# EAGLE board M_3x4._v8 (EAGLE 9.6.2), part 1 of 2
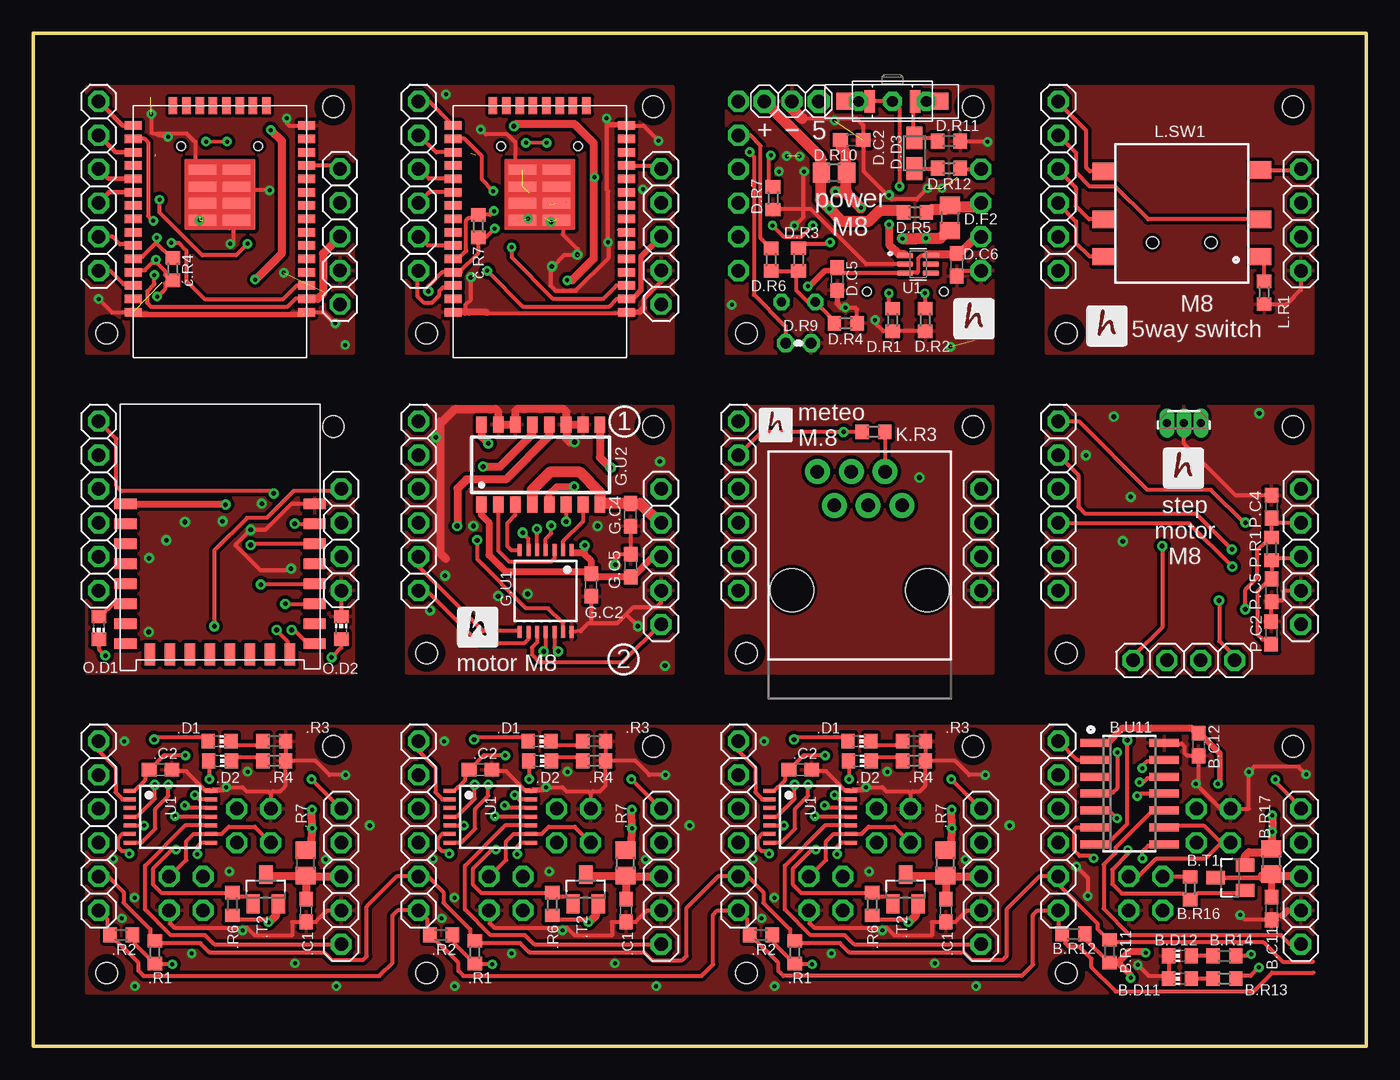
[diagram p0: board, top side]
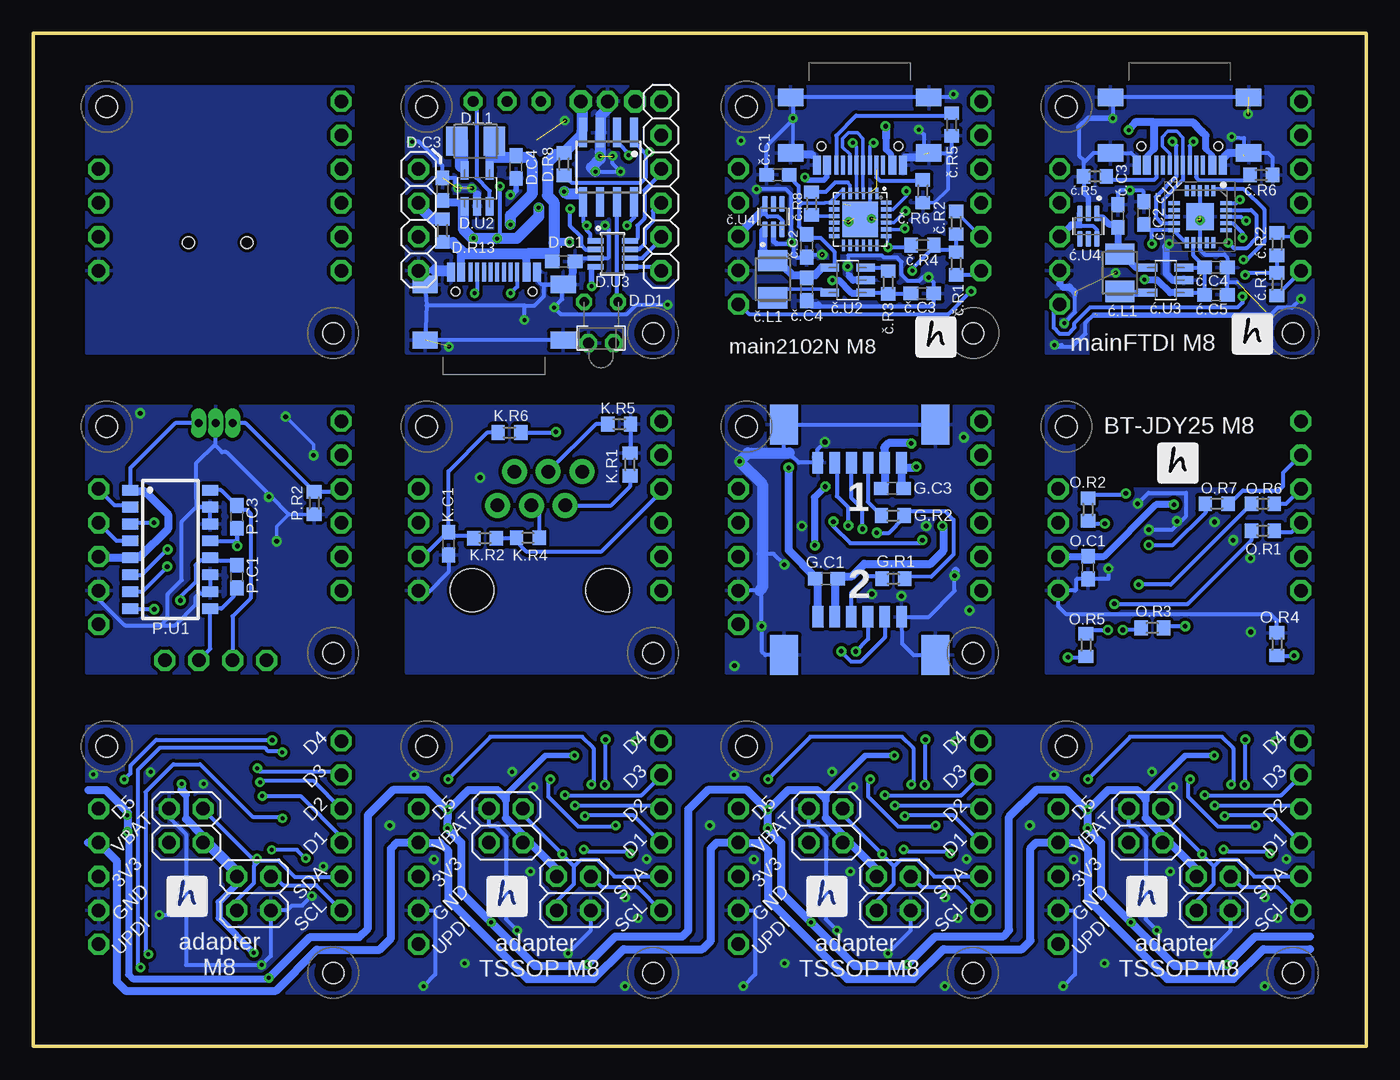
[diagram p1: board, bottom side, seen from below]

Size 100 x 76 mm. Coordinates in mm from the lower left corner, seen from the top.
Outline: 0,0 100,0 100,76 0,76 0,0
Copper layers (1*16): Top 0.035mm / dielectric 1.5mm / Bottom 0.035mm
Design rules "default *": minimum track width 10mil, minimum drill 0.3mm, track to track 6mil, track to pad 6mil, pad to pad 6mil, via to via 6mil, smd to smd 6mil, copper to edge 0mil, drill to drill 15mil, minimum pad ring 10mil, minimum via ring 8mil, stop-mask expansion 4mil, vias tented up to drill 14mil, thermal gap 10mil
Holes 1.6 mm at 53.5,53.5 70.5,70.5 77.5,53.5 94.5,70.5 70.5,46.5 53.5,29.5 77.5,29.5 94.5,46.5 22.5,46.5 77.5,5.5 94.5,22.5 29.5,29.5 46.5,46.5 5.5,5.5 22.5,22.5 29.5,5.5 46.5,22.5 53.5,5.5 70.5,22.5 29.5,53.5 46.5,70.5 5.5,53.5 22.5,70.5
tRestrict: area 69.5,69.5 to 71.5,71.5; area 52.5,52.5 to 54.5,54.5; area 93.5,69.5 to 95.5,71.5; area 76.5,52.5 to 78.5,54.5; area 69.5,45.5 to 71.5,47.5; area 52.5,28.5 to 54.5,30.5; area 93.5,45.5 to 95.5,47.5; area 76.5,28.5 to 78.5,30.5; area 21.5,45.5 to 23.5,47.5; area 93.5,21.5 to 95.5,23.5; area 76.5,4.5 to 78.5,6.5; area 45.5,45.5 to 47.5,47.5; 11 more areas
bRestrict: area 52.5,52.5 to 54.5,54.5; area 69.5,69.5 to 71.5,71.5; area 76.5,52.5 to 78.5,54.5; area 93.5,69.5 to 95.5,71.5; area 52.5,28.5 to 54.5,30.5; area 69.5,45.5 to 71.5,47.5; area 76.5,28.5 to 78.5,30.5; area 93.5,45.5 to 95.5,47.5; area 21.5,45.5 to 23.5,47.5; area 93.5,21.5 to 95.5,23.5; area 76.5,4.5 to 78.5,6.5; area 28.5,28.5 to 30.5,30.5; 11 more areas

## Footprints (pad centres in the part's own frame; a part is rotated, then mirrored left to right if it is on the bottom)
C0603 = smd 1.1 x 1: 1 -0.85,0; 2 0.85,0
CHIP-LED0603 = smd 1.1 x 1: A1 0,-0.85; C1 0,0.85
1X05 = drill 1.016 pad 1.575 octagon: 1 -5.08,0; 2 -2.54,0; 3 0,0; 4 2.54,0; 5 5.08,0
1X06 = drill 1.016 pad 1.575 octagon: 1 -6.35,0; 2 -3.81,0; 3 -1.27,0; 4 1.27,0; 5 3.81,0; 6 6.35,0
2X02 = drill 1.016 pad 1.575 octagon: 1 -1.27,-1.27; 2 -1.27,1.27; 3 1.27,-1.27; 4 1.27,1.27
R0603 = smd 1 x 1.1: 1 -0.85,0; 2 0.85,0
FUSE = smd 1.3 x 1.5: 1 -0.95,0; 2 0.95,0
SO23 = smd 1 x 1.4: D 0,1.1; G -0.95,-1.1; S 0.95,-1.1
SO14 = smd 0.6 x 2.2: 1 -3.81,-2.6; 2 -2.54,-2.6; 3 -1.27,-2.6; 4 0,-2.6; 5 1.27,-2.6; 6 2.54,-2.6; 7 3.81,-2.6; 8 3.81,2.6; 9 2.54,2.6; 10 1.27,2.6; 11 0,2.6; 12 -1.27,2.6; 13 -2.54,2.6; 14 -3.81,2.6
LED_1.8 = drill 0.7 octagon: 1 -1.27,-0.4; 2 1.27,-0.4
SHOTKY_2.8 = smd 1.7 x 1.2: A -1.15,0; K 1.15,0
R0805 = smd 1.3 x 1.5: 1 -0.95,0; 2 0.95,0
1X04 = drill 1.016 pad 1.575 octagon: 1 -3.81,0; 2 -1.27,0; 3 1.27,0; 4 3.81,0
L3230M = smd 1.6 x 2.2: 1 -1.4,0; 2 1.4,0
1X-03-2 = drill 1.016 pad 1.676 octagon: 1 -2.016,0; 3 2.048,0 | drill 1.016 pad 1.575 octagon: 2 -0.016,0
SWITCH = drill 0.8 pad 1.422 octagon: P$1 2.54,0; P$2 0,0; P$3 -2.54,0 | smd 0.8 x 1.7: P$4 -1.7,0; P$5 1.7,0 | smd 1.27 x 1.27: P$6 -3.556,0; P$7 3.556,0
THERM = drill 0.813 octagon: 1 -0.953,0; 2 0.953,0
SOP8 = smd 0.6 x 2.2: 1 -1.905,-2.6; 2 -0.635,-2.6; 3 0.635,-2.6; 4 1.905,-2.6; 5 1.905,2.6; 6 0.635,2.6; 7 -0.635,2.6; 8 -1.905,2.6
SOT32-5 = smd 0.6 x 1.4: BP 0.95,1.35; GND 0,-1.35; SHDN 0.95,-1.35; VIN -0.95,-1.35; VOUT -0.95,1.35
SOT23-8 = smd 0.4 x 1.2: 1 -0.975,-1.3; 2 -0.325,-1.3; 3 0.325,-1.3; 4 0.975,-1.3; 5 0.975,1.3; 6 0.325,1.3; 7 -0.325,1.3; 8 -0.975,1.3
A1250WR-6 = smd 0.8 x 1.6: 1 -3.128,2.54; 2 -1.878,2.54; 3 -0.628,2.54; 4 0.622,2.54; 5 1.872,2.54; 6 3.142,2.54 | smd 2.1 x 3: $1 -5.678,-0.34; $2 5.682,-0.34
TSSOP14 = smd 0.3 x 0.9: 1 -1.95,-3.06; 2 -1.3,-3.06; 3 -0.65,-3.06; 4 0,-3.06; 5 0.65,-3.06; 6 1.3,-3.06; 7 1.95,-3.06; 8 1.95,3.06; 9 1.3,3.06; 10 0.65,3.06; 11 0,3.06; 12 -0.65,3.06; 13 -1.3,3.06; 14 -1.95,3.06
SOP16 = smd 0.8 x 1.2: 1 -4.445,-3; 2 -3.175,-3; 3 -1.905,-3; 4 -0.635,-3; 5 0.635,-3; 6 1.905,-3; 7 3.175,-3; 8 4.445,-3; 9 4.445,3; 10 3.175,3; 11 1.905,3; 12 0.635,3; 13 -0.635,3; 14 -1.905,3; 15 -3.175,3; 16 -4.445,3
RJ11-6 = drill 1.016 pad 1.88: 1 -3.175,8.89; 2 -1.905,6.35; 3 -0.635,8.89; 4 0.635,6.35; 5 1.905,8.89; 6 3.175,6.35 | hole 3.251: -5.08,0; 5.08,0
5_WAY_SWITCH = smd 1.6 x 1.3: 1 -6,3; 2 -6,0.2; 3 -6,-3.5; 4 5.8,3; 5 5.8,0.2; 6 5.8,-3.4 | hole 0.9: 2.1,1.95; -2.3,1.95
SIP3-UA = drill 0.6 pad 0.889 long: 1 -1.27,0; 2 0,0; 3 1.27,0
SOT65P210X110-6N = smd 1.19 x 0.4: 1 -0.96,0.65; 2 -0.96,0; 3 -0.96,-0.65; 4 0.96,-0.65; 5 0.96,0; 6 0.96,0.65
USB-C = smd 0.6 x 1.45: A1B12 -3.235,3.825; A4B9 -2.46,3.825; B1A12 3.215,3.825; B4A9 2.44,3.825 | smd 0.3 x 1.45: A5 -1.26,3.825; A6 -0.26,3.825; A7 0.24,3.825; A8 1.24,3.825; B5 1.74,3.825; B6 0.74,3.825; B7 -0.76,3.825; B8 -1.76,3.825 | smd 1.9 x 1.3: SH1 -5.18,2.91; SH2 -5.18,-1.27; SH3 5.18,-1.27; SH4 5.18,2.91 | hole 0.65: 2.88,2.38; -2.9,2.38
JDY-25 = smd 1.676 x 0.813: ALED 14.6,2; GND 14.6,12.5; INPUT1 0.4,2; INPUT3 0.4,3.5; INPUT5 0.4,6.5; NC1 0.4,11; NC2 0.4,9.5; NC3 0.4,8; OUT3 14.6,3.5; OUT4 14.6,8; PWRC 14.6,9.5; RST 14.6,11; RXD 14.6,6.5; STAT 0.4,5; TXD 14.6,5; VCC 0.4,12.5 | smd 0.813 x 1.676: INPUT2 3.75,1.2; INPUT4 6.75,1.2; NC4 2.25,1.2; NC5 9.75,1.2; NC6 11.25,1.2; OUT1 12.75,1.2; OUT2 5.25,1.2; OUT5 8.25,1.2
TTGO-MICRO-32 = smd 1.27 x 0.635: 3V3 -6.5,5; EN -6.5,4; GND1 -6.5,6; GND2 -6.5,-8; GND3 6.5,6; IO0 6.5,-7; IO2 6.5,-8; IO4 6.5,-6; IO5 6.5,-3; IO12 -6.5,-7; IO14 -6.5,-6; IO16 6.5,-5; IO17 6.5,-4; IO18 6.5,-2; IO19 6.5,-1; IO21 6.5,1; IO22 6.5,4; IO23 6.5,5; IO25 -6.5,-3; IO26 -6.5,-4; IO27 -6.5,-5; IO32 -6.5,-1; IO33 -6.5,-2; IO34 -6.5,1; IO35 -6.5,0; NC 6.5,0; RXD0 6.5,2; TXD0 6.5,3; VN -6.5,2; VP -6.5,3 | smd 0.635 x 1.27: CLK 0.5,-9.5; CMD -0.5,-9.5; IO13 -3.5,-9.5; IO15 3.5,-9.5; SD0 1.5,-9.5; SD1 2.5,-9.5; SD2 -2.5,-9.5; SD3 -1.5,-9.5 | smd 2.032 x 0.762: GND4 -1.27,-0.889; GND5 1.27,-0.889; GND6 -1.27,-2.159; GND7 1.27,-2.159; GND8 -1.27,-3.429; GND9 -1.27,-4.699; GND10 1.27,-3.429; GND11 1.27,-4.699
QFN50P400X400X80-21N = smd 0.85 x 0.3: 1 -1.95,1; 2 -1.95,0.5; 3 -1.95,0; 4 -1.95,-0.5; 5 -1.95,-1; 11 1.95,-1; 12 1.95,-0.5; 13 1.95,0; 14 1.95,0.5; 15 1.95,1 | smd 0.3 x 0.85: 6 -1,-1.95; 7 -0.5,-1.95; 8 0,-1.95; 9 0.5,-1.95; 10 1,-1.95; 16 1,1.95; 17 0.5,1.95; 18 0,1.95; 19 -0.5,1.95; 20 -1,1.95 | smd 2.05 x 2.05: 21 0,0
QFN50P400X400X80-25N = smd 0.81 x 0.26: 1 -1.955,1.25; 2 -1.955,0.75; 3 -1.955,0.25; 4 -1.955,-0.25; 5 -1.955,-0.75; 6 -1.955,-1.25; 13 1.955,-1.25; 14 1.955,-0.75; 15 1.955,-0.25; 16 1.955,0.25; 17 1.955,0.75; 18 1.955,1.25 | smd 0.26 x 0.81: 7 -1.25,-1.955; 8 -0.75,-1.955; 9 -0.25,-1.955; 10 0.25,-1.955; 11 0.75,-1.955; 12 1.25,-1.955; 19 1.25,1.955; 20 0.75,1.955; 21 0.25,1.955; 22 -0.25,1.955; 23 -0.75,1.955; 24 -1.25,1.955 | smd 2.68 x 2.68: 25 0,0

## Placement (x,y rotation side)
B.C11  100n  [C0603]  92.9,10.33 270 top
B.C12  100n  [C0603]  87.41,22.63 270 top
B.D11  RED  [CHIP-LED0603]  86.03,5.07 90 top
B.D12  GREEN  [CHIP-LED0603]  86.03,6.78 90 top
B.J1  [1X05]  23.1,12.73 270 top
B.J2  [1X06]  4.9,16.54 90 top
B.J3  [2X02]  11.46,11.46 270 bottom
B.J4  [2X02]  16.54,16.54 270 bottom
B.J5  [1X06]  28.9,16.54 90 top
B.J6  [2X02]  35.46,11.46 270 bottom
B.J7  [2X02]  40.54,16.54 270 bottom
B.J8  [1X05]  47.1,12.73 270 top
B.J9  [1X06]  52.9,16.54 90 top
B.J10  [2X02]  59.46,11.46 270 bottom
B.J11  [2X02]  64.54,16.54 270 bottom
B.J12  [1X05]  71.1,12.73 270 top
B.J13  [1X06]  76.9,16.54 90 top
B.J14  [2X02]  83.46,11.46 270 bottom
B.J15  [2X02]  88.54,16.54 270 bottom
B.J16  [1X05]  95.1,12.73 270 top
B.R11  2k2  [R0603]  80.76,7.13 270 top
B.R12  2k2  [R0603]  78.04,8.43 0 top
B.R13  330  [R0603]  89.37,5.07 0 top
B.R14  2k2  [R0603]  89.37,6.78 0 top
B.R16  100k  [R0603]  86.78,11.86 90 top
B.R17  alt fuse or 0R  [FUSE]  92.9,13.85 90 top
B.T1  FDV304  [SO23]  89.8,12.64 90 top
B.U11  AT414  [SO14]  82.24,18.95 270 top
C.J1  [1X06]  4.9,64.54 90 top
C.J2  [1X06]  28.9,64.54 90 top
D.C1  4u7  [C0603]  60.2,58.88 180 bottom
D.C2  4u7  [C0603]  61.41,67.99 180 top
D.C3  4u7  [C0603]  69.31,64.3 270 bottom
D.C4  10u  [C0603]  63.79,65.97 90 bottom
D.C5  100n  [C0603]  60.31,57.57 90 top
D.C6  100n  [C0603]  69.28,58.64 90 top
D.D1  LED_1.8  [LED_1.8]  57.4,55.45 180 bottom
D.D3  SHOTKY_2.8  [SHOTKY_2.8]  66.11,66.99 90 top
D.F2  1.1A  [R0805]  68.79,62.15 90 top
D.J2  [1X06]  52.9,64.54 90 bottom
D.J3  [1X04]  71.1,62 270 bottom
D.L1  2u2  [L3230M]  66.82,67.91 0 bottom
D.LIPOL  PINHEAD-1X3-2  [1X-03-2]  56.9,70.89 180 top
D.ON/OFF/RESET  SWITCH  [SWITCH]  64.46,70.89 0 top
D.R1  5k1  [R0603]  64.46,54.5 270 top
D.R2  5k1  [R0603]  66.92,54.5 270 top
D.R3  3k3  [R0603]  57.41,59.04 90 top
D.R4  5k1  [R0603]  60.95,54.24 180 top
D.R5  0  [R0603]  66.16,62.57 0 top
D.R6  10k  [R0603]  55.35,59.02 90 top
D.R7  I=1800/R  [R0603]  55.5,63.62 90 top
D.R8  10k  [R0603]  60.19,66.18 90 bottom
D.R9  TERM_10K  [THERM]  57.4,52.75 180 top
D.R10  0.1  [R0805]  60.08,65.53 180 top
D.R11  390k  [R0603]  68.7,67.91 0 top
D.R12  100k  [R0603]  68.7,65.88 180 top
D.R13  0  [R0603]  69.31,61.2 90 bottom
D.U1  CN3083  [SOP8]  56.83,65.95 180 bottom
D.U2  LM3671_3.3  [SOT32-5]  66.7,64.37 0 bottom
D.U3  [SOT23-8]  56.53,59.45 270 bottom
G.C1  100n  [C0603]  40.5,35.07 180 bottom
G.C2  100n  [C0603]  41.85,34.61 90 top
G.C3  100n  [C0603]  35.55,41.85 0 bottom
G.C4  4u7  [C0603]  44.8,39.87 90 top
G.C5  4u7  [C0603]  44.82,36.06 270 top
G.J1  [1X06]  76.9,64.54 90 top
G.J2  [1X04]  95.1,62 270 top
G.J3  [1X06]  76.9,40.54 90 top
G.J4  [1X05]  95.1,36.73 270 top
G.J5  [1X06]  28.9,40.54 90 top
G.J6  [1X05]  47.1,36.73 270 top
G.J7  A1250WR-6  [A1250WR-6]  38,29.68 0 bottom
G.J8  [1X06]  4.9,40.54 90 top
G.J9  [1X04]  23.1,38 270 top
G.MOTO1  A1250WR-6  [A1250WR-6]  38,46.32 180 bottom
G.R1  100  [R0603]  35.47,35.07 0 bottom
G.R2  100  [R0603]  35.52,39.82 0 bottom
G.U1  ATTINY3224-XU  [TSSOP14]  38.45,34.15 180 top
G.U2  MX1508  [SOP16]  38.07,43.63 0 top
I.J3  [1X04]  71.1,38 270 top
J1  RJ11  [RJ11-6]  62,34.22 0 top
JP1  [1X05]  47.1,60.75 270 top
JP2  [1X05]  23,60.75 270 top
JP3  [1X04]  86.32,28.95 0 top
JP5  [1X06]  52.9,40.54 90 top
K.C1  100n  [C0603]  68.85,37.71 270 bottom
K.R1  100  [R0603]  55.23,43.65 270 bottom
K.R2  10k  [R0603]  66.11,38.12 0 bottom
K.R3  100  [R0603]  63.05,46.09 0 top
K.R4  100  [R0603]  62.9,38.14 0 bottom
K.R5  100  [R0603]  56.04,46.68 180 bottom
K.R6  10k  [R0603]  64.28,46.04 0 bottom
L.R1  2k2  [R0603]  92.34,56.53 270 top
L.SW1  5_WAY_SWITCH  [5_WAY_SWITCH]  86.07,62.24 180 top
O.C1  100n  [C0603]  20.87,35.91 90 bottom
O.D1  [CHIP-LED0603]  4.92,31.4 180 top
O.D2  [CHIP-LED0603]  23.1,31.4 0 top
O.R1  2k2  [R0603]  7.75,40.71 0 bottom
O.R2  2k2  [R0603]  20.87,40.27 270 bottom
O.R3  2k2  [R0603]  16.05,31.39 0 bottom
O.R4  2k2  [R0603]  6.7,30.17 270 bottom
O.R5  2k2  [R0603]  21.03,30.09 90 bottom
O.R6  2k2  [R0603]  7.75,38.68 0 bottom
O.R7  2k2  [R0603]  11.22,40.71 0 bottom
P.C1  100n  [C0603]  84.72,35.23 270 bottom
P.C2  100n  [C0603]  92.87,31.01 270 top
P.C3  100n  [C0603]  84.72,39.71 270 bottom
P.C4  4u7  [C0603]  92.89,40.48 270 top
P.C5  4u7  [C0603]  92.91,34.2 90 top
P.R1  0 (alt)  [R0603]  92.9,37.32 270 top
P.R2  0 (alt)  [R0603]  78.93,40.76 90 bottom
P.U1  MX1508  [SOP16]  89.72,37.28 270 bottom
P.U2  A1202UA  [SIP3-UA]  86.33,46.75 180 top
U1  LM66100DCKR  [SOT65P210X110-6N]  66.38,58.66 0 top
U$1  USB-C  [USB-C]  38,69.93 180 bottom
U$2  USB-C  [USB-C]  14,69.93 180 bottom
U$3  USB-C  [USB-C]  65.43,54.25 0 bottom
U$4  JDY-25  [JDY-25]  6.5,28.2 0 top
ć.C2  100n  [C0603]  16.68,62.52 90 bottom
ć.C3  10u  [C0603]  18.64,62.29 90 bottom
ć.C4  100n  [C0603]  11.27,58.43 0 bottom
ć.C5  4u7  [C0603]  11.27,56.38 180 bottom
ć.L1  2u2  [L3230M]  18.48,58.03 90 bottom
ć.R1  2k2  [R0603]  6.7,57.17 90 bottom
ć.R2  2k2  [R0603]  6.7,60.18 270 bottom
ć.R4  2k2  [R0603]  10.48,58.31 90 top
ć.R5  5K1  [R0603]  20.35,65.26 0 bottom
ć.R6  5k1  [R0603]  7.87,65.36 180 bottom
ć.U1  TTGO-MICRO-32  [TTGO-MICRO-32]  13.99,61.08 180 top
ć.U2  FT231XQ-R  [QFN50P400X400X80-21N]  12.47,62.24 270 bottom
ć.U3  LM3671_3.3  [SOT32-5]  15.03,57.48 90 bottom
ć.U4  LM66100DCKR  [SOT65P210X110-6N]  20.85,61.53 270 bottom
č.C1  100n  [C0603]  44.14,65.38 0 bottom
č.C2  4u7  [C0603]  41.98,60.06 270 bottom
č.C3  4k7  [C0603]  33.3,56.48 180 bottom
č.C4  10u  [C0603]  41.98,56.79 270 bottom
č.L1  2u2  [L3230M]  44.51,57.55 90 bottom
č.R1  2k2  [R0603]  30.77,58.73 90 bottom
č.R2  2k2  [R0603]  30.77,61.78 270 bottom
č.R3  100k  [R0603]  35.86,57.31 270 bottom
č.R4  100k  [R0603]  33.28,60.11 0 bottom
č.R5  5K1  [R0603]  31.1,69.15 90 bottom
č.R6  5k1  [R0603]  33.27,64.15 90 bottom
č.R7  4k7  [R0603]  33.39,61.53 90 top
č.R8  1k  [R0603]  41.61,63.23 90 bottom
č.U1  CP2102N  [QFN50P400X400X80-25N]  37.96,62.03 270 bottom
č.U2  LM3671_3.3  [SOT32-5]  38.9,57.48 90 bottom
č.U3  TTGO-MICRO-32  [TTGO-MICRO-32]  37.99,61.08 180 top
č.U4  LM66100DCKR  [SOT65P210X110-6N]  44.47,62.24 90 bottom
Ḃ.C1  100n  [C0603]  20.47,10.18 270 top
Ḃ.C2  100n  [C0603]  9.55,20.75 0 top
Ḃ.D1  RED  [CHIP-LED0603]  13.97,22.88 270 top
Ḃ.D2  GREEN  [CHIP-LED0603]  14,21.41 270 top
Ḃ.R1  2k2  [R0603]  9.11,7.06 270 top
Ḃ.R2  2k2  [R0603]  6.6,8.35 0 top
Ḃ.R3  330  [R0603]  18.07,22.88 180 top
Ḃ.R4  2k2  [R0603]  18.08,21.41 180 top
Ḃ.R6  100k  [R0603]  14.93,10.66 270 top
Ḃ.R7  alt fuse or 0R  [FUSE]  20.44,13.75 90 top
Ḃ.T2  FDV304  [SO23]  17.44,11.78 0 top
Ḃ.U1  ATTINY3224-XU  [TSSOP14]  10.28,17.22 270 top
Ḅ.C1  100n  [C0603]  44.47,10.18 270 top
Ḅ.C2  100n  [C0603]  33.55,20.75 0 top
Ḅ.D1  RED  [CHIP-LED0603]  37.97,22.88 270 top
Ḅ.D2  GREEN  [CHIP-LED0603]  38,21.41 270 top
Ḅ.R1  2k2  [R0603]  33.11,7.06 270 top
Ḅ.R2  2k2  [R0603]  30.6,8.35 0 top
Ḅ.R3  330  [R0603]  42.08,22.88 180 top
Ḅ.R4  2k2  [R0603]  42.08,21.41 180 top
Ḅ.R6  100k  [R0603]  38.93,10.66 270 top
Ḅ.R7  alt fuse or 0R  [FUSE]  44.44,13.75 90 top
Ḅ.T2  FDV304  [SO23]  41.44,11.78 0 top
Ḅ.U1  ATTINY3224-XU  [TSSOP14]  34.28,17.22 270 top
Ḇ.C1  100n  [C0603]  68.47,10.18 270 top
Ḇ.C2  100n  [C0603]  57.55,20.75 0 top
Ḇ.D1  RED  [CHIP-LED0603]  61.97,22.88 270 top
Ḇ.D2  GREEN  [CHIP-LED0603]  62,21.41 270 top
Ḇ.R1  2k2  [R0603]  57.11,7.06 270 top
Ḇ.R2  2k2  [R0603]  54.6,8.35 0 top
Ḇ.R3  330  [R0603]  66.08,22.88 180 top
Ḇ.R4  2k2  [R0603]  66.08,21.41 180 top
Ḇ.R6  100k  [R0603]  62.93,10.66 270 top
Ḇ.R7  alt fuse or 0R  [FUSE]  68.44,13.75 90 top
Ḇ.T2  FDV304  [SO23]  65.44,11.78 0 top
Ḇ.U1  ATTINY3224-XU  [TSSOP14]  58.28,17.22 270 top

## Library data of the parts
B.C11 B.C12 D.C1-D.C6 G.C1-G.C5 K.C1 O.C1 P.C1-P.C5 ć.C2-ć.C5 č.C1-č.C4 Ḃ.C1 Ḃ.C2 Ḅ.C1 Ḅ.C2 Ḇ.C1 Ḇ.C2 = rcl; SPICEPREFIX: C
B.D11 B.D12 O.D1 O.D2 Ḃ.D1 Ḃ.D2 Ḅ.D1 Ḅ.D2 Ḇ.D1 Ḇ.D2 = led
B.J1-B.J16 C.J1 C.J2 D.J2 D.J3 D.LIPOL G.J1-G.J6 G.J8 G.J9 I.J3 JP1-JP3 JP5 = pinhead2
B.R11-B.R14 B.R16 D.F2 D.R1-D.R8 D.R10-D.R13 G.R1 G.R2 K.R1-K.R6 L.R1 O.R1-O.R7 P.R1 P.R2 ć.R1 ć.R2 ć.R4-ć.R6 č.R1-č.R8 Ḃ.R1-Ḃ.R4 Ḃ.R6 Ḅ.R1-Ḅ.R4 Ḅ.R6 Ḇ.R1-Ḇ.R4 Ḇ.R6 = rcl; SPICEPREFIX: R
B.R17 B.T1 D.D1 D.D3 D.ON/OFF/RESET D.R9 D.U1 D.U3 G.J7 G.MOTO1 G.U2 L.SW1 P.U1 U$1-U$4 ć.U1 č.U3 Ḃ.R7 Ḃ.T2 Ḅ.R7 Ḅ.T2 Ḇ.R7 Ḇ.T2 = hugo
B.U11 = atmel
D.L1 ć.L1 č.L1 = rcl; SPICEPREFIX: L
D.U2 ć.U3 č.U2 = !stavebnice03
G.U1 Ḃ.U1 Ḅ.U1 Ḇ.U1 = ATTINY412-SSN
J1 = SparkFun-Connectors; PROD_ID: CONN-08590; SF_ID: PRT-00132
P.U2 = allegro2; OC_FARNELL: unknown; OC_NEWARK: unknown
U1 ć.U4 č.U4 = LM66100DCKR; AVAILABILITY: In Stock; CHECK_PRICES: https://www.snapeda.com/parts/LM66100DCKR/Texas+Instruments/view-part/?ref=eda; DESCRIPTION: 1.5-V to 5.5-V, 1.5-A, 0.5-µA IQ ideal diode with integrated FET; MF: Texas Instruments; MP: LM66100DCKR; PACKAGE: SOT-SC70-6 Texas Instruments; PRICE: None; SNAPEDA_LINK: https://www.snapeda.com/parts/LM66100DCKR/Texas+Instruments/view-part/?ref=snap
ć.U2 = FT231XQ-R; DESCRIPTION: FTDI Chip FT231XQ-R, USB Transceiver; HEIGHT: 0.8mm; MANUFACTURER_NAME: FTDI Chip; MANUFACTURER_PART_NUMBER: FT231XQ-R
č.U1 = CP2104; AVAILABILITY: Unavailable; DESCRIPTION: USB Bridge, USB to UART USB 2.0 UART Interface 24-QFN (4x4); MF: Silicon Labs; MP: CP2104; PACKAGE: QFN-24 Silicon Labs; PRICE: None

## Nets
5V: D.C1.2 D.LIPOL.1 D.R3.2 D.R8.2 D.R13.1 D.U1.4 U$3.A4B9 U$3.B4A9
_FOTOA1_: G.MOTO1.5 G.U1.4
_FOTOA2_: G.J7.5 G.U1.12
CENTER: G.J2.1 L.SW1.3
CHRG: D.D1.2 D.R3.1 D.R4.2 D.R6.1
COMMON: L.R1.1 L.SW1.1
DOWN: G.J1.6 L.SW1.6
FOTOB1: G.MOTO1.4 G.U1.5
FOTOB2: G.J7.4 G.U1.11
GND: JP1.4 U$1.A1B12 U$1.B1A12 U$1.SH1 U$1.SH2 U$1.SH3 U$1.SH4 č.C1.1 č.C2.2 č.C3.1 č.C4.2 č.R5.1 č.R6.1 č.U1.2 č.U1.25 č.U2.GND č.U3.GND1 č.U3.GND2 č.U3.GND3 č.U3.GND4 č.U3.GND5 č.U3.GND6 č.U3.GND7 č.U3.GND8 č.U3.GND9 č.U3.GND10 č.U3.GND11 č.U4.2
GND1: JP2.4 U$2.A1B12 U$2.B1A12 U$2.SH1 U$2.SH2 U$2.SH3 U$2.SH4 ć.C2.2 ć.C3.2 ć.C4.2 ć.C5.1 ć.R5.1 ć.R6.1 ć.U1.GND1 ć.U1.GND2 ć.U1.GND3 ć.U1.GND4 ć.U1.GND5 ć.U1.GND6 ć.U1.GND7 ć.U1.GND8 ć.U1.GND9 ć.U1.GND10 ć.U1.GND11 ć.U2.3 ć.U2.13 ć.U2.21 ć.U3.GND ć.U4.2
GND2: B.C11.2 B.C12.2 B.D11.C1 B.D12.C1 B.J1.4 B.J3.4 B.J4.1 B.J6.4 B.J7.1 B.J8.4 B.J10.4 B.J11.1 B.J12.4 B.J14.4 B.J15.1 B.J16.4 B.U11.14 Ḃ.C1.2 Ḃ.C2.2 Ḃ.R3.1 Ḃ.R4.1 Ḃ.U1.14 Ḅ.C1.2 Ḅ.C2.2 Ḅ.R3.1 Ḅ.R4.1 Ḅ.U1.14 Ḇ.C1.2 Ḇ.C2.2 Ḇ.R3.1 Ḇ.R4.1 Ḇ.U1.14
GND3: G.J9.4 O.C1.1 O.D2.C1 O.R4.1 U$4.GND
GND4: D.C1.1 D.C2.1 D.C3.1 D.C4.1 D.C5.1 D.C6.1 D.J3.4 D.LIPOL.2 D.R1.2 D.R2.2 D.R4.1 D.R7.1 D.R9.1 D.R11.2 D.U1.3 D.U2.GND D.U3.3 U1.2 U$3.A1B12 U$3.B1A12 U$3.SH1 U$3.SH2 U$3.SH3 U$3.SH4
GND5: G.J2.4 L.R1.2
GND6: G.J4.4 P.C2.1 P.C4.1 P.C5.1 P.R2.1 P.U1.10 P.U1.11 P.U1.14 P.U1.15 P.U2.2
GND7: G.C2.1 G.C4.1 G.C5.1 G.J6.4 G.J7.6 G.J7.$1 G.J7.$2 G.MOTO1.6 G.MOTO1.$1 G.MOTO1.$2 G.U1.14 G.U2.10 G.U2.11 G.U2.14 G.U2.15
GND9: I.J3.4 K.C1.2 K.R1.1 K.R5.1
IN+: D.C2.2 D.C3.2 D.F2.1 D.ON/OFF/RESET.P$2 D.ON/OFF/RESET.P$3 D.ON/OFF/RESET.P$4 D.ON/OFF/RESET.P$6 D.R10.1 D.U1.5 D.U1.8 D.U2.VIN D.U3.1
IN-: D.LIPOL.3 D.R5.1 D.R10.2 D.U3.2
INA1: G.J4.1 P.U1.2
INA2: G.J3.5 P.U1.6
INA3: G.U1.13 G.U2.6
INA4: G.U1.3 G.U2.2
INB1: G.J3.6 P.U1.3
INB2: G.J3.3 P.U1.7
INB3: G.U1.7 G.U2.3
INB4: G.U1.2 G.U2.7
LEFT: G.J1.5 L.SW1.2
M_V: G.J4.2 P.C4.2 P.R1.1 P.U1.4 P.U1.8
M_V1: G.C4.2 G.J6.2 G.U2.4 G.U2.8
MA1: JP3.2 P.C3.1 P.U1.16
MA2: JP3.4 P.C1.1 P.U1.12
MA3: G.C3.1 G.MOTO1.2 G.U2.16
MA4: G.C1.1 G.J7.2 G.U2.12
MB1: JP3.1 P.C3.2 P.U1.13
MB2: JP3.3 P.C1.2 P.U1.9
MB3: G.C3.2 G.MOTO1.1 G.U2.13
MB4: G.C1.2 G.J7.1 G.U2.9
N$1: U$1.A7 U$1.B7 č.U1.4
N$2: U$1.A6 U$1.B6 č.U1.3
N$3: U$1.A5 č.R6.2
N$4: U$1.B5 č.R5.2
N$5: U$2.A7 U$2.B7 ć.U2.9
N$6: C.J2.6 č.U3.IO2
N$7: JP1.1 č.U3.IO27
N$8: č.R8.2 č.U1.5
N$9: U$2.A6 U$2.B6 ć.U2.8
N$10: č.L1.1 č.U2.VOUT
N$11: č.R3.1 č.U2.SHDN
N$12: C.J2.5 č.U3.IO4
N$13: C.J2.4 č.U3.IO17
N$14: C.J2.3 č.U3.IO5
N$15: U$2.A5 ć.R6.2
N$16: č.R8.1 č.U1.9
N$17: U$2.B5 ć.R5.2
N$18: ć.L1.1 ć.U3.VOUT
N$19: ć.C2.1 ć.U2.10 ć.U2.11 ć.U2.20
N$21: Ḃ.D1.A1 Ḃ.U1.4
N$22: Ḃ.D2.C1 Ḃ.R4.2
N$24: Ḃ.D1.C1 Ḃ.R3.2
N$25: B.J1.3 Ḃ.C1.1 Ḃ.R7.1 Ḃ.T2.D
N$27: Ḅ.D1.A1 Ḅ.U1.4
N$28: Ḅ.D2.C1 Ḅ.R4.2
N$29: Ḅ.D1.C1 Ḅ.R3.2
N$30: D.L1.1 D.U2.VOUT
N$31: D.R1.1 U$3.B5
N$32: D.R2.1 U$3.A5
N$33: D.R7.2 D.U1.2
N$34: D.D1.1 D.U1.7
N$35: D.R8.1 D.R9.2 D.U1.1
N$36: D.D3.K D.ON/OFF/RESET.P$1 D.ON/OFF/RESET.P$5 D.ON/OFF/RESET.P$7 D.R11.1 D.U2.SHDN
N$37: D.D3.A D.R12.2
N$38: G.J3.4 P.R2.2 P.U2.3
N$39: B.J8.3 Ḅ.C1.1 Ḅ.R7.1 Ḅ.T2.D
N$40: Ḇ.D1.A1 Ḇ.U1.4
N$41: Ḇ.D2.C1 Ḇ.R4.2
N$42: Ḇ.D1.C1 Ḇ.R3.2
N$43: B.J12.3 Ḇ.C1.1 Ḇ.R7.1 Ḇ.T2.D
N$44: B.C11.1 B.J16.3 B.R17.1 B.T1.D
N$45: B.D12.A1 B.R14.1
N$46: B.R13.2 B.U11.4
N$47: G.J9.1 O.R3.2
N$48: O.R1.1 U$4.RXD
N$49: O.R6.1 U$4.TXD
N$50: G.J8.5 O.R7.2
N$51: O.R7.1 U$4.PWRC
N$52: O.D2.A1 O.R5.1
N$53: O.R5.2 U$4.ALED
N$54: O.D1.A1 U$4.STAT
N$55: JP5.5 K.R3.1 K.R6.2
N$56: JP5.4 K.R2.2 K.R4.1
N$57: J1.3 K.R5.2
N$58: J1.2 K.R1.2
N$59: J1.5 K.R3.2
N$60: J1.4 K.R4.2
N$61: O.D1.C1 O.R4.2
N$62: O.R2.2 U$4.RST
N$63: G.J8.6 O.R2.1
N$64: O.R3.1 U$4.OUT1
PA1: C.J1.3 ć.U1.IO5
PA2: C.J1.4 ć.U1.IO17
PA3: C.J1.5 ć.U1.IO4
PA4: C.J1.6 ć.U1.IO2
PA5: JP2.1 ć.U1.IO27
PA5-1: D.J3.1 D.R12.1
PA6: B.J2.5 Ḃ.U1.13
PA7: B.J2.4 Ḃ.U1.12
PA8: B.J2.6 Ḃ.U1.2
PA9: B.J2.3 Ḃ.U1.11
PA10: Ḃ.D2.A1 Ḃ.U1.5
PA11: B.J5.5 Ḅ.U1.13
PA12: B.J5.4 Ḅ.U1.12
PA13: B.J5.6 Ḅ.U1.2
PA14: B.J5.3 Ḅ.U1.11
PA15: Ḅ.D2.A1 Ḅ.U1.5
PA16: B.J9.5 Ḇ.U1.13
PA17: B.J9.4 Ḇ.U1.12
PA18: D.J2.4 D.U3.8
PA19: D.J2.3 D.U3.7
PA20: D.J2.5 D.R6.2
PA21: B.J9.6 Ḇ.U1.2
PA22: B.J9.3 Ḇ.U1.11
PA23: Ḇ.D2.A1 Ḇ.U1.5
PA24: B.J13.5 B.U11.13
PA25: B.J13.4 B.U11.12
PA26: B.J13.6 B.U11.2
PA27: B.J13.3 B.U11.11
PA28: B.R14.2 B.U11.5
PA51: B.D11.A1 B.R13.1
PB1: Ḅ.R6.1 Ḅ.T2.G Ḅ.U1.6
PB2: B.J1.1 Ḃ.U1.7
PB3: Ḃ.R6.1 Ḃ.T2.G Ḃ.U1.6
PB4: B.J8.1 Ḅ.U1.7
PB5: Ḇ.R6.1 Ḇ.T2.G Ḇ.U1.6
PB6: B.J12.1 Ḇ.U1.7
PB7: B.R16.1 B.T1.G B.U11.6
PB8: B.J16.1 B.U11.7
POWER1: G.MOTO1.3 G.R2.1
POWER2: G.J7.3 G.R1.1
POWER_LED: G.R1.2 G.R2.2 G.U1.6
PROG: č.U1.23 č.U3.IO0
PROG1: ć.U1.IO0 ć.U2.18
RESET: č.R4.1 č.U1.19 č.U3.EN
RESET1: ć.U1.EN ć.U2.19
RIGHT: G.J1.4 L.SW1.5
RX: JP1.5 č.R7.1 č.U1.20 č.U3.TXD0
RX1: G.J8.3 O.R6.2
RX/TX: JP2.5 ć.R4.1 ć.U1.TXD0 ć.U2.1
SCL: C.J2.1 č.R1.1 č.U3.IO22
SCL1: C.J1.1 ć.R1.1 ć.U1.IO22
SCL2: G.J5.1 G.U1.9
SCL3: B.J2.1 B.J3.2 B.J4.3 B.J5.1 B.J6.2 B.J7.3 B.J9.1 B.J10.2 B.J11.3 B.J13.1 B.J14.2 B.J15.3 B.R12.1 B.U11.9 Ḃ.R2.1 Ḃ.U1.9 Ḅ.R2.1 Ḅ.U1.9 Ḇ.R2.1 Ḇ.U1.9
SCL4: D.J2.1 D.U3.5
SDA: C.J2.2 č.R2.1 č.U3.IO21
SDA1: C.J1.2 ć.R2.1 ć.U1.IO21
SDA2: B.J2.2 B.J3.3 B.J4.2 B.J5.2 B.J6.3 B.J7.2 B.J9.2 B.J10.3 B.J11.2 B.J13.2 B.J14.3 B.J15.2 B.R11.1 B.U11.8 Ḃ.R1.1 Ḃ.U1.8 Ḅ.R1.1 Ḅ.U1.8 Ḇ.R1.1 Ḇ.U1.8
SDA3: G.J5.2 G.U1.8
SDA4: D.J2.2 D.U3.6
TX: č.R7.2 č.U1.21 č.U3.RXD0
TX1: G.J8.4 O.R1.2
TX/RX: ć.R4.2 ć.U1.RXD0 ć.U2.17
UP: G.J1.3 L.SW1.4
UPDI: B.J1.5 Ḃ.U1.10
UPDI1: B.J8.5 Ḅ.U1.10
UPDI2: B.J12.5 Ḇ.U1.10
UPDI3: B.J16.5 B.U11.10
UPDI4: G.J6.5 G.U1.10
VBAT: B.J1.2 B.J8.2 B.J12.2 B.J16.2
VCC: JP1.3 č.R1.2 č.R2.2 č.R4.2 č.U3.3V3 č.U4.3 č.U4.6
VCC1: č.C1.2 č.C2.1 č.C4.1 č.L1.2 č.U1.6 č.U1.7 č.U2.BP č.U4.1
VCC2: JP2.3 ć.R1.2 ć.R2.2 ć.U1.3V3 ć.U4.3 ć.U4.6
VCC3: ć.C3.1 ć.L1.2 ć.U3.BP ć.U4.1
VCC4: B.C12.1 B.J3.1 B.J4.4 B.J6.1 B.J7.4 B.J10.1 B.J11.4 B.J14.1 B.J15.4 B.R11.2 B.R12.2 B.R16.2 B.R17.2 B.T1.S B.U11.1 Ḃ.C2.1 Ḃ.R1.2 Ḃ.R2.2 Ḃ.R6.2 Ḃ.R7.2 Ḃ.T2.S Ḃ.U1.1 Ḅ.C2.1 Ḅ.R1.2 Ḅ.R2.2 Ḅ.R6.2 Ḅ.R7.2 Ḅ.T2.S Ḅ.U1.1 Ḇ.C2.1 Ḇ.R1.2 Ḇ.R2.2 Ḇ.R6.2 Ḇ.R7.2 Ḇ.T2.S Ḇ.U1.1
VCC5: G.J9.3 O.C1.2 U$4.VCC
VCC6: D.C4.2 D.L1.2 D.U2.BP U1.1
VCC7: D.C5.2 D.C6.2 D.J3.3 D.U3.4 U1.3 U1.6
VCC8: G.J2.3
VCC9: G.J4.3 P.C2.2 P.C5.2 P.R1.2 P.U1.1 P.U1.5 P.U2.1
VCC10: G.C2.2 G.C5.2 G.J6.3 G.U1.1 G.U2.1 G.U2.5
VCC11: I.J3.3 K.C1.1 K.R2.1 K.R6.1
VOPT: D.F2.2 D.J3.2 D.R5.2 D.R13.2
VUSB: U$1.A4B9 U$1.B4A9 č.C3.2 č.R3.2 č.U2.VIN
VUSB1: U$2.A4B9 U$2.B4A9 ć.C4.1 ć.C5.2 ć.U2.12 ć.U3.SHDN ć.U3.VIN

## Tracks (layer width: path | path; a pad name or v marks a point on that pad's centre or on a via)
5V  (via drill 0.3)
  Top 0.305: D.R3.2 57.69,60.16 59.63,60.16 v59.77,60.31
  Bottom 0.254: 67.78,59.45 67.7,59.45
  Bottom 0.305: 60.9,60.31 60.95,60.26
  Bottom 0.61: 62.99,58.52 U$3.B4A9 62.99,59.37 62.91,59.45 | D.R8.2 60.24,67.03 60.37,66.9 | U$3.A4B9 67.89,59.34 67.78,59.45 | 58.84,68.65 D.U1.4 58.74,68.5 58.84,68.4 | v59.77,60.31 60.9,60.31
  Bottom 0.813: D.R8.2 58.84,68.38 58.84,68.4 | 60.37,66.9 60.84,66.9 61.43,66.31 61.43,63.82 60.95,63.34 60.95,60.26 60.95,59.47 60.96,59.45 61.15,59.45 | D.C1.2 61.14,58.96 61.15,59.45 | 61.15,59.45 62.91,59.45 67.7,59.45 68.54,60.3 69.25,60.3 D.R13.1 | 58.84,68.65 58.84,70.38 59.17,70.71 D.LIPOL.1
_FOTOA1_  (via drill 0.35)
  Top 0.305: G.U1.4 38.45,38.07 38.85,38.47 v38.85,39.06
  Bottom 0.305: G.MOTO1.5 39.87,43.75 39.72,43.6 39.72,41.27 38.85,40.4 v38.85,39.06
_FOTOA2_  (via drill 0.35)
  Top 0.305: G.U1.12 39.1,29.92 v39.38,29.63
  Bottom 0.305: G.J7.5 36.11,32.21 36.11,30.68 37.95,28.84 38.64,28.84 39.38,29.58 v39.38,29.63
CENTER
  Top 0.305: L.SW1.3 95.03,65.74 G.J2.1
CHRG
  Top 0.305: D.R4.2 60.1,54.4 58.55,55.95 58.55,55.85 D.D1.2 58.66,55.84 58.11,55.84 57.24,56.7 57.24,58.09 | D.R6.1 57.19,58.17 57.19,58.09 57.24,58.09 | 57.24,58.09 57.32,58.09 D.R3.1
  Bottom 0.305: D.D1.2
COMMON
  Top 0.305: L.R1.1 92.32,57.4 92.32,58.99 L.SW1.1
DOWN
  Top 0.305: L.SW1.6 79.28,65.64 78.97,65.95 78.97,68.73 76.9,70.8 G.J1.6
FOTOB1  (via drill 0.35)
  Top 0.305: G.U1.5 v37.8,38.79 v37.79,38.8
  Bottom 0.305: G.MOTO1.4 38.66,43.75 38.66,41.16 37.79,40.29 v37.79,38.8
FOTOB2  (via drill 0.35)
  Top 0.305: G.U1.11 38.45,29.78 v38.3,29.62
  Bottom 0.305: G.J7.4 37.38,30.54 v38.3,29.62
GND  (via drill 0.3, 0.35)  (8 unrouted)
  Top 0.254: 37.25,61.97 37.63,62.34 37.97,62.34 38.6,61.71 | 36.92,61.97 36.67,61.71 | č.U3.GND9 č.U3.GND8
  Top 0.305: 43.15,69.13 43.01,69.27 v43.01,69.62 | 44.44,69.13 č.U3.GND2 45.76,69.08 v46.91,67.93 | č.U3.GND3 | v43.01,69.62 43.01,69.47 | 33.65,68.88 v33.57,68.79 33.93,68.42 35.56,68.42 36.15,67.83 36.15,66.29 37.23,65.21 37.23,64.26 37.23,62.93 37.23,61.63 | 38.7,63.1 37.23,61.63 | 37.23,61.63 37.23,61.56 35.73,61.56 | 39.82,61.76 39.74,61.76 | 39.74,61.76 38.65,61.76 38.6,61.71 36.67,61.71 | 37.25,61.97 36.92,61.97 č.U3.GND5 | 39.54,64.23 č.U3.GND8 | č.U3.GND6 39.26,63.95 39.54,64.23 | 39.54,64.23 39.56,64.25 | č.U3.GND1 44.38,54.97 34.1,54.97 33.99,55.07 | 39.74,61.76 39.74,60.9 40.84,59.81 40.84,59.35 39.82,59.35 38.98,58.51 v38.91,58.51 38.8,58.41 38.8,57.06 39.17,56.69 40.68,56.69 43.17,59.18 43.18,60.26 v43.12,60.31 43.12,64.12 43.05,64.2 43.05,69.58 v43.01,69.62 | 32.63,55.15 32.71,55.07 | 32.43,55.07 32.43,55.63 32.83,56.04 v32.83,57.7 | 45.81,55.43 45.81,56.08 47.1,57.36
  Top 0.406: 44.44,69.13 43.15,69.13 | č.U3.GND1 44.51,55.1 45.48,55.1 45.81,55.43 | 47.1,57.36 JP1.4
  Top 0.508: 33.99,55.07 32.71,55.07 32.43,55.07 č.U3.GND3 | č.U3.GND1 44.45,55.11 | č.U3.GND10 36.98,64.5 37.23,64.26 | č.U3.GND7 36.92,63.23 37.23,62.93
  Bottom 0.254: v43.01,69.62 43.01,67.07 U$1.SH4 | č.U1.2 37.23,63.97 37.25,62.09 v37.12,62.09 37.91,62.09 č.U1.25 38.37,62.44 | č.R6.1 32.38,63.3 31.36,64.32 | 38.75,57.82 38.91,57.97 v38.91,58.51 38.85,58.56 38.85,59.33
  Bottom 0.305: 42.99,69.62 v43.01,69.62 | U$1.A1B12 34.77,66.51 34.74,66.51 | 34.59,66.68 34.59,66.51 34.74,66.51 | 34.74,66.51 34.74,66.33 | v33.57,68.79 33.18,68.4 33.18,66.9 | v43.01,69.62 43.01,71.15 U$1.SH3 U$1.SH2 31.17,71.2 v30.95,71.41 31.04,71.33 31.03,71.22 | 42.82,67.02 U$1.SH4 42.87,67.02 42.74,66.89 | U$1.SH1 33.26,66.68 | 38.18,62.24 č.U1.25 | 38.37,62.44 37.77,63.04 | 43.06,69.57 v43.01,69.62 | U$1.B1A12 41.22,66.55 41.56,66.89 | 31.36,64.32 31.36,66.86 31.52,67.02 U$1.SH1 | č.U2.GND 37.42,57.35 | 44.26,60.2 43.17,60.2 43.17,60.26 v43.12,60.31 | č.C4.2 41.65,55.61 | 41.03,55.52 32.57,55.52 32.45,55.64 č.C3.1 32.45,57.31 v32.83,57.7 33.26,57.7 33.54,57.42 34.4,57.42 34.87,57.89 34.87,58.84 35.2,59.18 36.2,59.18 36.34,59.33 38.85,59.33 | U$1.SH1 31.16,67.02 31.1,67.08 č.R5.1 | č.C1.1 44.99,67.53 43.01,69.51 v43.01,69.62 | 42.41,59.21 č.C2.2 | v43.12,60.31 42.97,60.16 42.97,59.4 42.73,59.16 42.46,59.16 42.41,59.21 | 40.86,59.35 42.27,59.35 42.41,59.21 | v45.74,64.3 v45.73,64.31 43.55,64.31 43.17,63.93 43.17,60.37 v43.12,60.31
  Bottom 0.406: 41.12,55.61 41.03,55.52 | č.U4.2 44.47,60.41 44.26,60.2
  Bottom 0.508: č.U1.25 38.08,62.14 38.42,62.14 | č.U2.GND 38.49,57.48 38.75,57.74 38.75,57.82 | 41.65,55.61 41.12,55.61
  Bottom 0.61: 41.56,66.89 42.74,66.89 | 33.26,66.68 34.59,66.68
  other vias: 38.83,61.84 40.81,59.4
  pour Top (isolate 0.254): 28,52 28,72 48,72 48,52
  pour Bottom (isolate 0.254): 28,72 48,72 48,52 28,52
GND1  (via drill 0.3)  (8 unrouted)
  Top 0.254: v14.78,60.22 14.98,60.42 | ć.U1.GND4 ć.U1.GND6 ć.U1.GND8 ć.U1.GND9 | ć.U1.GND11 12.72,65.5 | 12.72,65.5 12.72,65.14 ć.U1.GND10 ć.U1.GND7 ć.U1.GND5 ć.U1.GND4 | ć.U1.GND4 14.7,61.41 14.7,61.38 | 12.15,66.29 12.15,66.07 12.72,65.5
  Top 0.305: ć.U1.GND2 19.22,69.08 19.21,69.06 19.01,69.27 v19.01,69.62 19.01,69.47 | ć.U1.GND3 | 9.4,68.37 v10.1,68.24 | v10.1,68.24 9.31,68.49 | 20.35,54.96 20.38,54.96 ć.U1.GND1 21.74,55.08 22.61,54.2 v22.66,54.25 | v10.1,68.24 9.5,68.47 11.51,68.47 12.15,67.83 12.15,66.29 | 14.98,60.42 14.98,61.84 14.7,62.12 | 14.7,61.38 14.7,62.12 | 14.7,62.12 14.7,63.1 | v17.73,64.22 15.18,64.22 14.27,65.14 12.72,65.14 | ć.U1.GND3 7.69,54.88 | v10.1,68.24 9.31,68.38 8.86,68.52 v8.86,69.94 | v4.9,56.07 5.89,55.08 ć.U1.GND3
  Top 0.406: 20.19,54.88 7.69,54.88
  Bottom 0.254: 19.01,67.07 U$2.SH4 | ć.U3.GND 13.71,57.52 | 6.87,65.11 ć.R6.1
  Bottom 0.305: v19.01,69.62 19,69.62 | v10.1,68.24 9.18,68.14 9.18,66.9 | v19.01,69.62 19.01,71.15 U$2.SH3 U$2.SH2 | 18.82,67.02 U$2.SH4 | 9.16,66.78 U$2.SH1 7.36,67.02 7.02,66.68 ć.R6.1 | 19.06,69.57 v19.01,69.62 | U$2.B1A12 17.21,66.55 | 17.21,66.55 17.21,66.61 17.62,67.02 U$2.SH4 | 17.21,66.55 17.23,66.56 | 17.04,63.02 ć.C2.2 16.68,64.1 16.81,64.22 v17.73,64.22 18.43,64.22 18.64,64.02 ć.C3.2 18.66,63.27 | ć.U2.3 ć.U2.21 ć.U2.13 12.47,59.77 12.1,59.4 10.64,59.4 10.42,59.18 ć.C4.2 10.42,57.34 | U$2.SH4 19.56,66.64 | v4.9,56.07 5.57,55.4 6.64,55.4 7.19,54.85 7.21,54.83 7.04,54.83 | 22.84,52.62 v23.39,52.62 23.21,52.44 22.07,52.44 21.05,53.46 21.05,54.28 20.43,54.91 20.4,54.91 20.35,54.85 | v22.66,54.25 21.84,55.07 21.84,56.31 | 20.85,63.67 21.13,63.95 21.13,65.19 ć.R5.1 21.2,66.48 | ć.C5.1 10.42,57.34 | 10.42,57.34 9.68,57.34 | 21.2,66.48 21.09,66.38 20.45,67.02 U$2.SH4 | 21.54,68.94 21.54,66.83 21.2,66.48
  Bottom 0.406: 20.35,54.85 7.19,54.85 | 23,57.18 22.78,56.97 | 21.54,68.94 20.86,69.62 19,69.62 | ć.U4.2 20.85,63.67
  Bottom 0.508: 13.7,57.5 ć.U3.GND 14.52,57.48 15.03,57.99 15.03,59.96 | JP2.4 23,57.18 | 21.86,56.57 22.26,56.97 22.78,56.97
  Bottom 0.61: v14.78,60.22 15.03,59.96 | U$2.SH1 10.33,67.02 10.77,66.58 U$2.A1B12 | ć.C3.2 18.64,63.29
  other vias: 12.47,61.96 18.79,58.03
  pour Top (isolate 0.25): 4,52 4,72 24,72 24,52
  pour Bottom (isolate 0.25): 4,72 24,72 24,52 4,52
GND2  (via drill 0.3, 0.35)
  Top 0.305: B.J16.4 94.11,10.19 | 84.81,22.76 B.U11.14 84.89,22.69 86.15,22.69 86.37,22.47 86.37,22.02 86.56,21.83 87.01,21.83 | B.C12.2 87.41,19.86 v87.23,19.68 89.11,17.81 B.J15.1 91.2,17.81 v91.2,20.57 91.6,20.97 94.91,20.97 v95.49,20.39 | 85.17,5.28 B.D12.C1 85.12,6.78 | B.D11.C1 85.38,5.28 85.17,5.28 | 83.09,5.87 v82.87,6.09 83.68,5.28 85.17,5.28 | 93.7,9.78 93.2,9.78 B.C11.2 90.91,9.48 v90.54,9.85 | v78.24,13.48 79.11,12.62 v79.11,11.27 | B.J10.4 58.27,10.11 58.27,9.22 58.59,8.89 63.91,8.89 v63.69,8.68 | 71.1,10.14 B.J12.4 71.06,10.15 70.02,10.15 69.19,9.33 Ḇ.C1.2 67.4,9.33 67.4,8.29 64.64,8.29 64.03,8.89 | 62.45,19.45 v62.47,19.43 | v62.47,19.43 63.69,19.43 64.01,19.11 65.66,19.11 65.81,18.95 | 65.81,18.95 B.J11.1 | 61.59,19.22 61.54,19.17 Ḇ.U1.14 61.26,19.19 60.9,19.19 59.47,20.62 58.52,20.62 Ḇ.C2.2 | 62.2,19.22 62.41,19.43 v62.47,19.43 | 71.38,20.34 v71.41,20.34 70.22,20.34 69.17,21.39 67.1,21.39 | 67.27,21.06 Ḇ.R4.1 | Ḇ.R4.1 Ḇ.R3.1 | 65.81,18.95 65.98,19.12 66.51,19.12 66.93,19.54 Ḇ.R4.1 | B.J6.4 34.27,10.11 34.27,9.22 34.59,8.89 39.91,8.89 v39.69,8.68 | 47.1,10.14 B.J8.4 47.06,10.15 46.02,10.15 45.19,9.33 Ḅ.C1.2 43.4,9.33 43.4,8.29 40.64,8.29 40.03,8.89 | 38.45,19.45 v38.47,19.43 | v38.47,19.43 39.69,19.43 40.01,19.11 41.66,19.11 41.81,18.95 | 41.81,18.95 B.J7.1 | 37.59,19.22 37.54,19.17 Ḅ.U1.14 37.26,19.19 36.9,19.19 35.47,20.62 34.52,20.62 Ḅ.C2.2 | 38.2,19.22 38.41,19.43 v38.47,19.43 | 47.38,20.34 v47.41,20.34 46.22,20.34 45.17,21.39 43.1,21.39 | 43.27,21.06 Ḅ.R4.1 | Ḅ.R4.1 Ḅ.R3.1 | 41.81,18.95 41.98,19.12 42.51,19.12 42.93,19.54 Ḅ.R4.1 | B.J3.4 10.27,10.11 10.27,9.22 10.59,8.89 15.9,8.89 v15.69,8.68
  Top 0.305: 23.1,10.14 B.J1.4 23.07,10.15 22.02,10.15 21.19,9.33 Ḃ.C1.2 19.4,9.33 19.4,8.29 16.64,8.29 16.03,8.89 | 14.45,19.45 v14.47,19.43 | v14.47,19.43 15.69,19.43 16.01,19.11 17.66,19.11 17.81,18.95 | 17.81,18.95 B.J4.1 | 13.59,19.22 13.54,19.17 Ḃ.U1.14 13.26,19.19 12.9,19.19 11.47,20.62 10.52,20.62 Ḃ.C2.2 | 14.2,19.22 14.41,19.43 v14.47,19.43 | 23.38,20.34 v23.41,20.34 22.22,20.34 21.17,21.39 19.1,21.39 | 19.27,21.06 Ḃ.R4.1 | Ḃ.R4.1 Ḃ.R3.1 | 17.81,18.95 17.98,19.12 18.51,19.12 18.93,19.54 Ḃ.R4.1
  Top 0.406: 87.01,21.83 87.06,21.78 B.C12.2 | 62.2,19.22 61.59,19.22 | 38.2,19.22 37.59,19.22 | 14.2,19.22 13.59,19.22
  Top 0.508: 94.11,10.19 93.7,9.78
  Bottom 0.305: B.J15.1 89.81,17.16 88.54,15.89 88.54,9.85 | 88.54,9.85 88.54,6.09 v82.87,6.09 82.19,6.77 82.2,9.44 82.19,9.45 B.J14.4 80.94,10.19 80.57,10.56 79.82,10.56 v79.11,11.27 | v90.54,9.85 88.54,9.85 | B.J10.4 58.19,9.45 58.2,9.44 58.2,8.64 v59.88,6.95 60.05,6.95 | v63.69,8.68 64.54,9.53 64.54,15.76 65.28,16.51 65.65,16.51 65.81,16.67 B.J11.1 | B.J12.4 69.88,10.19 69.84,10.15 69.84,5.38 v70.73,4.5 | B.J6.4 34.19,9.45 34.2,9.44 34.2,8.64 v35.88,6.95 36.05,6.95 | v39.69,8.68 40.54,9.53 40.54,15.76 41.28,16.51 41.65,16.51 41.81,16.67 B.J7.1 | B.J8.4 45.88,10.19 45.84,10.15 45.84,5.38 v46.73,4.5 | B.J3.4 10.19,9.45 10.2,9.44 10.2,8.64 v11.88,6.95 12.05,6.95 | v15.69,8.68 16.54,9.53 16.54,15.76 17.29,16.51 17.65,16.51 17.81,16.67 B.J4.1 | B.J1.4 21.88,10.19 21.84,10.15 21.84,5.38 v22.73,4.5
  other vias: 73.25,16.55 53.99,14.04 55.59,11.15 54.83,22.88 67.63,6.22 62.7,13.1 55.61,4.5 64.07,20.59 54.65,9.6 69.94,14.02 29.99,14.04 31.59,11.15 30.83,22.88 43.63,6.22 38.7,13.1 31.61,4.5 40.07,20.59 30.65,9.6 45.94,14.02 5.99,14.04 7.59,11.15 6.83,22.88 19.63,6.22 14.7,13.1 7.61,4.5 16.07,20.59 6.65,9.6 21.94,14.02 25.24,16.55 49.24,16.55
  pour Bottom (isolate 0.254): 52,24 52,4 72,4 72,24
  pour Top (isolate 0.254): 52,24 52,4 72,4 72,24
  pour Bottom (isolate 0.254): 28,24 28,4 48,4 48,24
  pour Top (isolate 0.254): 28,24 28,4 48,4 48,24
  pour Bottom (isolate 0.254): 4,24 4,4 96,4 96,24
  pour Top (isolate 0.254): 4,24 4,4 96,4 96,24
GND3  (via drill 0.35)
  Top 0.305: G.J9.4 O.D2.C1 | U$4.GND 19.36,40.7 17.42,38.75 v16.3,38.75 15.15,37.6 17.04,35.7 19.33,35.7 v19.33,35.84
  Bottom 0.305: O.R4.1 6.7,31.96 7.15,32.4 22.5,32.4 23.1,33 G.J9.4 | G.J9.4 23.1,34.43 | O.C1.1 20.9,35.08 | v19.33,35.84 19.33,35.06 O.C1.1 | v16.3,38.75 14.55,38.75 13.51,39.79 13.51,41.52 16.33,41.52 v17.14,40.71 | O.C1.1 21.7,35.06 21.76,34.99 21.76,34.26 21.83,34.19 G.J9.4
  other vias: 8.66,31.08 8.68,36.62 11.37,39.34 14.19,39.39 9.98,37.96
  pour Top (isolate 0.254): 4,48 4,28 24,28 24,48
  pour Bottom (isolate 0.254): 4,48 4,28 24,28 24,48
GND4  (via drill 0.3)  (5 unrouted)
  Top 0.305: v63.15,54.5 63.15,54.27 63.77,53.65 D.R1.2 D.R2.2 | 57.79,62.8 57.79,62.21 57.15,61.57 v57.11,61.57 | 57.79,62.8 57.79,65.62 v57.83,65.62 | D.R11.2 71.54,67.91 v71.59,67.86 | v67.1,64.38 66.26,63.54 64.4,63.54 64.33,63.62 64.13,63.81 | 57.67,69.61 61.76,69.61 62.26,69.11 D.C2.1 62.3,67.99 62.3,65.65 64.13,63.81 | v60.92,55.44 61.65,55.44 61.8,55.28 D.R4.1 | D.R7.1 55.53,62.8 57.79,62.8 | v64.2,63.87 64.13,63.81 | U1.2 62.5,58.66 58.36,62.8 57.79,62.8 | D.C6.1 69.68,58.19 D.J3.4
  Top 0.406: D.C5.1 60.31,55.73 60.61,55.44 v60.92,55.44
  Top 0.61: 56.94,70.34 56.92,70.39 D.LIPOL.2
  Top 0.813: 57.67,69.61 56.94,70.34
  Bottom 0.305: 63.15,55.57 70.49,55.57 70.51,55.59 | U$3.SH4 60.42,57.21 60.95,57.21 60.83,57.09 60.31,57.09 | U$3.SH1 70.51,55.59 | 70.51,55.59 U$3.SH2 U$3.SH3 60.14,52.75 D.R9.1 | 63.15,54.63 v63.15,54.5 | v63.15,54.5 63.13,54.47 | v63.15,54.5 63.15,55.57 | 59.54,57.18 59.63,57.09 60.31,57.09 | 59.51,58.72 D.C1.1 59.05,58.88 58.8,59.12 D.U3.3 57.81,59.14 56.87,59.14 56.82,59.2 56.82,61.23 57.15,61.56 57.15,61.57 v57.11,61.57 | U$3.B1A12 62.21,57.51 61.87,57.16 U$3.SH4 | 63.15,55.57 62.39,55.57 61.69,56.28 61.69,56.99 61.52,57.16 U$3.SH4 | v71.59,67.86 71.06,67.86 69.56,66.36 69.56,66.32 69.31,66.07 D.C3.1 68.34,65.15 68.34,64.62 68.33,64.62 68.09,64.38 67.17,64.38 66.7,63.91 | v52.41,55.64 54.74,55.64 55.45,54.94 60.42,54.94 v60.92,55.44 60.31,56.05 60.31,57.09 | v57.83,65.62 v55.95,65.62 56.53,66.21 v56.53,66.79
  Bottom 0.406: 69.87,58.48 70,58.35 | 70,58.35 70.16,58.19 | U$3.A1B12 68.66,58.1 68.83,58.27 68.91,58.19 | 70.16,58.19 D.J3.4 71.1,57.75 | 70.16,58.19 69.81,58.19 | 70,58.35 69.84,58.18 69.84,57.22 | v64.2,63.87 64.1,63.87 63.79,64.18 D.C4.1
  Bottom 0.61: 60.31,57.34 60.37,57.29 U$3.SH4 60.24,57.29 | 71.1,57.75 U$3.SH1 | U$3.B1A12 62.16,58.13 | D.U1.3 57.47,69.73 | 59.54,57.18 59.51,58.72 | D.U2.GND 66.7,63.91 | D.LIPOL.2 56.92,70.36
  Bottom 0.813: 69.81,58.19 68.91,58.19 | v57.83,65.62 58.13,65.93 57.47,66.59 D.U1.3 57.44,68.58 57.44,69.83 56.92,70.36
  other vias: 57.49,66.77 68.17,64.38 68.82,52.49 60.11,69.46
  pour Top (isolate 0.254): 52,72 52,52 72,52 72,72
  pour Bottom (isolate 0.254, rank 3): 52,72 72,72 72,52 52,52
GND5
  Top 0.305: L.R1.2 94.03,55.69 95.1,56.76 G.J2.4
  pour Top (isolate 0.254): 76,72 76,52 96,52 96,72
  pour Bottom (isolate 0.254): 76,72 76,52 96,52 96,72
GND6  (via drill 0.35)
  Top 0.305: 94.44,34.19 G.J4.4 93.87,34.19 93.81,34.13 93.81,33.56 93.73,33.48 92.91,33.48 P.C5.1 92.87,33.32 P.C2.1 | P.C4.1 90.22,41.33 86.33,45.22 P.U2.2
  Bottom 0.254: P.R2.1 80.84,39.91 81.75,39 v81.75,37.89 | v82.33,41.22 82.24,41.31 | v81.06,47.24 78.98,45.15 v78.98,44.34
  Bottom 0.305: G.J4.4 95.1,33.53 93.14,31.57 90.46,31.57 | P.U1.11 P.U1.10 86.85,33.98 87.52,33.98 87.81,33.69 87.81,33.13 89.36,31.57 90.46,31.57 | P.U1.15 87.79,40.45 | 87.79,40.45 88.86,39.38 88.86,34.97 89.9,33.93 89.9,32.13 90.46,31.57 | P.U1.14 P.U1.15 | P.U1.15 86.74,40.44 87.7,40.44 | 80.84,39.91 82.24,41.31 85.5,44.57 85.84,44.57 86.33,45.06 86.33,45.18 | 86.33,45.18 P.U2.2 | 87.79,40.45 87.79,41.11 87.81,41.12 87.81,43.7 86.33,45.18
  other vias: 91.98,47.49
  pour Top (isolate 0.254): 76,48 76,28 96,28 96,48
  pour Bottom (isolate 0.254): 76,48 76,28 96,28 96,48
GND7  (via drill 0.35)
  Top 0.305: G.C4.1 44.82,39.01 G.C5.1 43.87,36.91 43.65,36.7 v43.65,36.14 | 47.1,33.8 G.J6.4 47.1,33.29 46.73,32.92 45,32.92 44.48,32.39 | G.U1.14 41.06,31.16 41.65,31.75 41.85,31.75 | G.C2.1 41.85,31.75 | 41.85,31.75 43.83,31.75 44.48,32.39 | 44.48,32.39 v45.36,31.51
  Top 0.61: G.U2.11 G.U2.10 | G.U2.11 39.97,47.62 39.77,47.82 36.31,47.82 36.16,47.67 G.U2.14 G.U2.15 34.86,46.66 34.86,47.63 34.68,47.81 31.65,47.81 30.72,46.88 30.52,46.88 30.52,37.01 30.96,36.57 | G.U2.11 40,46.6 40,45.59 40.25,45.33 v40.61,45.33
  Bottom 0.305: 43.01,29.34 45.08,29.34 45.36,29.62 v45.36,31.51 45.36,34.33 | 43.08,44.29 43.08,44.21 43.72,44.85 43.72,46.66 32.99,46.66 | 30.8,35.68 30.8,35.37 v30.88,35.3 30.88,34.16 32.81,32.22 G.J7.6 34.83,30.21 33.96,29.34 32.28,29.34 | v40.61,45.33 41.17,44.76 G.MOTO1.6 42.57,43.78 43.08,44.29 | 43.08,44.29 43.3,44.51 | 45.51,34.18 G.J6.4 | v43.65,36.14 44.47,36.95 45.3,36.95
  Bottom 0.61: 30.8,35.68 30.81,35.68
  Bottom 0.813: 43.3,44.51 46.38,44.51 v47.01,43.88 45.3,42.18 45.3,36.95 45.3,34.38 45.36,34.33 45.51,34.18 | 41.2,44.21 41.17,44.19 G.MOTO1.6
  other vias: 29.76,32.71 42.33,39.03 47.39,28.54 37.08,33.93 34.87,33.77 30.19,45.69 33.01,39.03
  pour Top (isolate 0.254): 28,48 28,28 48,28 48,48
  pour Bottom (isolate 0.254): 28,48 28,28 48,28 48,48
GND9  (via drill 0.35)
  Bottom 0.305: K.C1.2 68.84,35.56 70.29,34.12 71.03,34.12 I.J3.4 | K.R5.1 55.19,44.53 K.R1.1
  other vias: 66.49,42.66
  pour Top (isolate 0.254): 51.97,48 72,48 72,28 51.97,28
  pour Bottom (isolate 0.254): 52,48 72,48 72,28 52,28
IN+  (via drill 0.3)
  Top 0.305: D.ON/OFF/RESET.P$6 D.ON/OFF/RESET.P$3 D.ON/OFF/RESET.P$4 D.ON/OFF/RESET.P$2 65,70.35 v65,64.53 v64.98,64.52 | v55.45,61.57 56.27,60.76 57.63,60.76 v58.48,61.57
  Top 0.508: 66.29,60.6 66.82,60.6
  Top 0.61: v60.18,64.12 61.02,64.12
  Top 0.813: D.R10.1 60.92,65.63 60.92,67.07 60.61,67.38 60.61,67.94 D.C2.2 | D.R10.1 61.11,65.53 | D.R10.1 60.97,65.47 60.97,64.12 v60.18,64.12 | 68.85,61.1 68.85,61.14 D.F2.1 68.64,61.2 68.04,60.6 66.95,60.6 | v66.97,60.62 66.95,60.6 | 66.95,60.6 66.82,60.6 66.33,60.6 | v65.19,60.6 66.29,60.6 | 61.02,64.12 61.02,63.99 v62.09,62.92
  Bottom 0.305: D.U2.VIN 67.65,63.33 | D.C3.2 69.09,63.24 69.1,63.33 | v64.98,64.52 65.01,64.49 65.01,60.78 v65.19,60.6 | D.U3.1 58.06,60.42 58.24,60.6 58.24,60.97 58.48,61.22 v58.48,61.57 58.74,61.86 D.U1.5 | v55.45,61.57 55.45,61.66 54.93,62.18 D.U1.8
  Bottom 0.508: 58.87,63.97 58.74,64.1 | 58.74,63.92 58.69,63.97
  Bottom 0.61: 58.74,63.95 D.U1.5 58.74,63.92 58.74,64.1 | 69.1,63.33 67.65,63.33 | D.U2.VIN 67.75,62.92
  Bottom 0.813: v60.18,64.12 60.03,63.97 58.87,63.97 | 67.75,62.92 67.75,61.32 67.03,60.6 v65.19,60.6 63.74,60.6 62.09,62.24 v62.09,62.92
IN-  (via drill 0.3)
  Top 0.813: D.LIPOL.3 59.05,66.69 59.05,65.83 59.12,65.75 D.R10.2 59.12,65.07 59.04,64.99 59.04,63.53 59.73,62.85 v59.73,62.83 60.68,61.88 62.67,61.88 63.49,62.7 65.18,62.7 D.R5.1
  Bottom 0.305: D.U3.2 57.84,59.77 58.55,59.77 58.91,60.13 58.91,60.73 59.73,61.54 v59.73,62.83
INA1
  Bottom 0.305: P.U1.2 92.86,40.59 93.91,40.59 95.1,41.78 G.J4.1
INA2  (via drill 0.35)
  Top 0.305: v89.93,37.28 87.23,39.98 78.89,39.98 78.4,40.48 78.4,42.85 G.J3.5
  Bottom 0.305: P.U1.6 91.86,35.37 89.95,37.28 v89.93,37.28
INA3  (via drill 0.35)
  Top 0.305: v33.29,37.97 v33.29,37.96 33.29,36.54 36.97,32.86 38.63,32.86 39.75,31.74 G.U1.13 | G.U2.6 v39.97,39.36
  Bottom 0.305: v39.97,39.36 39.97,39.01 38.7,37.74 33.42,37.74 33.29,37.87 v33.29,37.97
INA4
  Top 0.305: G.U2.2 34.9,37.17 35.73,36.34 38.83,36.34 39.1,36.61 G.U1.3
INB1  (via drill 0.35)
  Top 0.305: v90.95,39.29 90.82,39.29 88.36,41.75 83.58,41.75 78.44,46.89 G.J3.6
  Bottom 0.305: P.U1.3 92.6,39.31 90.97,39.31 v90.95,39.29
INB2  (via drill 0.35)
  Top 0.305: G.J3.3 76.94,39.23 86.71,39.23 v89.95,35.98
  Bottom 0.305: P.U1.7 91.81,34.1 89.95,35.95 v89.95,35.98
INB3
  Top 0.305: 36.16,40.1 G.U2.3 36.16,39.84 35.55,39.23 35.55,37.54 35.88,37.21 35.89,37.22 G.U1.7
INB4
  Top 0.305: G.U2.7 41.24,39.39 39.75,37.89 G.U1.2
LEFT
  Top 0.305: L.SW1.2 83.65,62.04 81.18,64.51 79.27,64.51 78.24,65.53 78.24,67.01 G.J1.5
M_V  (via drill 0.35)
  Top 0.305: G.J4.2 93.25,39.27 P.C4.2 P.R1.1 92.64,37.91 92.53,37.91 91.81,37.19 91.81,35.14 90.93,34.26 v90.93,32.79
  Bottom 0.305: P.U1.4 93.74,37.91 G.J4.2 | P.U1.8 92.68,32.79 v90.93,32.79
M_V1
  Top 0.813: G.U2.4 37.43,41.75 38.75,43.07 41,43.07 42.51,41.56 G.U2.8 42.51,40.78 42.57,40.72 G.C4.2 44.82,40.74 45.53,40.74 47,39.27 G.J6.2
MA1
  Bottom 0.305: P.U1.16 85.91,41.72 84.75,40.56 P.C3.1 84.42,40.26 84,40.26 83.7,39.96 83.7,33.6 85.05,32.25 JP3.2
MA2  (via drill 0.35)
  Top 0.305: v88.97,33.44 88.97,30.4 90.13,29.23 JP3.4
  Bottom 0.305: P.C1.1 85.06,36.44 86.52,36.44 P.U1.12 86.91,36.46 87.47,36.46 87.83,36.1 87.83,34.83 88.97,33.7 v88.97,33.44
MA3  (via drill 0.35)
  Top 0.61: G.U2.16 33.62,45.74 v34.13,45.23
  Bottom 0.61: v34.13,45.23 34.32,45.23 34.35,45.26 35.83,45.26 36.17,44.91 36.16,44.89 G.MOTO1.2 36.12,42.12 G.C3.1
MA4  (via drill 0.35)
  Top 0.61: v31.79,39.03 31.82,39.06 31.82,41.85 32.5,42.54 35.46,42.54 38.7,45.77 G.U2.12
  Bottom 0.61: v31.79,39.03 31.72,38.96 31.72,37.16 32.69,36.19 37.64,36.19 38.58,35.25 39.47,35.25 G.C1.1 39.86,34.72 39.86,32.23 G.J7.2
MB1  (via drill 0.35)
  Top 0.305: v84.69,37.53 84.69,31.44 82.59,29.33 82.59,29.02 JP3.1
  Bottom 0.305: 86.67,37.97 P.U1.13 84.76,37.91 84.72,37.95 P.C3.2 84.72,37.56 v84.69,37.53
MB2
  Bottom 0.305: P.C1.2 84.99,34.11 84.98,33.74 85.89,32.83 P.U1.9 86.72,29.81 JP3.3
MB3  (via drill 0.35)
  Top 0.61: v33.75,43.48 35.01,43.48 37.42,45.9 G.U2.13
  Bottom 0.61: 34.86,43.09 34.91,43.11 G.MOTO1.1 | v33.75,43.48 33.83,43.4 34.87,43.4 G.MOTO1.1 | G.MOTO1.1 34.87,41.84 34.87,41.85 G.C3.2
MB4  (via drill 0.35)
  Top 0.61: v43.33,43.4 43.28,43.4 42.51,44.18 G.U2.9
  Bottom 0.61: v43.33,43.4 43.34,43.39 43.34,37.22 41.35,35.22 G.C1.2 41.15,35.07 41.15,32.28 G.J7.1
N$1  (via drill 0.3)
  Top 0.254: v38.51,67.78 v36.96,67.78
  Top 0.305: v38.51,67.78
  Bottom 0.254: U$1.B7 37.24,67.49 37.22,67.52 v36.96,67.78 | U$1.A7 38.24,67.5 v38.51,67.78 | U$1.A7 | U$1.A7 38.24,66.41 | U$1.A7 38.24,64.01 č.U1.4
N$2
  Bottom 0.254: č.U1.3 37.75,64.02 U$1.A6 37.74,68.11 38.18,68.54 38.83,68.54 39.28,68.09 39.28,67.47 38.75,66.94 38.75,66.11 U$1.B6
N$3
  Bottom 0.305: U$1.A5 36.75,65.2 36.49,64.95 33.8,64.95 33.75,65 č.R6.2
N$4
  Bottom 0.305: U$1.B5 39.76,66.12 39.76,68.32 38.27,69.82 31.28,69.82 č.R5.2
N$5  (via drill 0.3)
  Top 0.254: v14.53,67.88 v12.96,67.88
  Top 0.305: v14.54,67.88 v14.53,67.88
  Bottom 0.305: ć.U2.9 14.43,61.76 15.37,61.76 15.79,62.19 15.79,63.72 14.23,65.28 U$2.A7 14.24,67.58 v14.54,67.88 | U$2.B7 13.25,67.56 12.96,67.85 v12.96,67.88
N$6
  Top 0.305: č.U3.IO2 29.68,70.89 C.J2.6
N$7
  Top 0.305: č.U3.IO27 46.83,66.08 JP1.1
N$8
  Bottom 0.254: č.R8.2 41.34,64.34 | 38.91,64.81 38.72,64.61 č.U1.5
  Bottom 0.305: 38.91,64.81 39.85,64.81 40.57,64.09 č.R8.2
N$9
  Bottom 0.254: U$2.A6 13.74,68.18 14.2,68.64 14.88,68.64 15.3,68.22 15.3,67.54 14.75,66.99 14.75,66.11 U$2.B6
  Bottom 0.305: U$2.A6 13.74,65.01 15.23,63.53 15.23,62.43 15.04,62.24 ć.U2.8
N$10
  Bottom 0.254: č.U2.VOUT 40.62,56.53 40.88,56.79 43.87,56.79 č.L1.1
  Bottom 0.305: 40.28,56.53 č.U2.VOUT
  Bottom 0.508: 44.37,56.29 č.L1.1 | č.U2.VOUT 40.26,56.54
N$11
  Bottom 0.305: č.U2.SHDN 36.14,58.43 č.R3.1
N$12
  Top 0.305: č.U3.IO4 30.22,67.08 C.J2.5
N$13
  Top 0.305: č.U3.IO17 29.68,65.08 C.J2.4
N$14
  Top 0.305: č.U3.IO5 29.71,64.08 C.J2.3
N$15
  Bottom 0.254: 12.74,65.33 U$2.A5 | ć.R6.2 9.04,65.59
  Bottom 0.305: ć.R6.2 9.08,65 12.57,65 12.74,65.17 12.74,65.33
N$16
  Bottom 0.254: 41.51,62.28 č.U1.9
  Bottom 0.305: č.R8.1 41.51,62.28
N$17
  Bottom 0.254: U$2.B5 15.77,66.08
  Bottom 0.305: U$2.B5 15.73,65.18 15.92,64.99 19.23,64.99 ć.R5.2
N$18
  Bottom 0.305: 16.41,56.53 ć.U3.VOUT
  Bottom 0.508: ć.L1.1 18.37,56.52 16.39,56.52 ć.U3.VOUT
N$19  (via drill 0.3)
  Top 0.305: v16.07,60.21 15.21,59.35 12.68,59.35 9.47,62.55 v9.47,63.52
  Bottom 0.305: 16.07,60.41 v16.07,60.21 16.07,61.24 | ć.U2.20 9.75,63.24 v9.47,63.52 | ć.U2.11 13.52,60.29 14.42,61.19 ć.U2.10 16.07,61.24 | ć.C2.1 16.38,61.37 | 16.35,61.34 ć.C2.1 | 16.07,61.24 16.25,61.24 ć.C2.1
N$21  (via drill 0.35)
  Top 0.305: Ḃ.U1.4 7.29,17.21 7.75,17.21 9.11,18.57 v9.11,19.61 | Ḃ.D1.A1 12.82,23.18 9.24,23.18 v9.06,23.01
  Bottom 0.305: v9.06,23.01 9.09,22.98 9.09,19.64 v9.11,19.61
N$22
  Top 0.305: Ḃ.R4.2 16.98,21.66 15.1,21.66 Ḃ.D2.C1
N$24
  Top 0.305: Ḃ.R3.2 16.92,22.58 15.13,22.58 Ḃ.D1.C1
N$25
  Top 0.305: Ḃ.R7.1 20.44,12.73
  Top 0.508: 20.44,11.06 Ḃ.C1.1
  Top 0.61: 20.44,12.73 B.J1.3 | Ḃ.T2.D 17.6,12.72 20.37,12.72 Ḃ.R7.1 20.47,12.78 Ḃ.C1.1
N$27  (via drill 0.35)
  Top 0.305: Ḅ.U1.4 31.29,17.21 31.75,17.21 33.11,18.57 v33.11,19.61 | Ḅ.D1.A1 36.82,23.18 33.24,23.18 v33.06,23.01
  Bottom 0.305: v33.06,23.01 33.09,22.98 33.09,19.64 v33.11,19.61
N$28
  Top 0.305: Ḅ.R4.2 40.98,21.66 39.1,21.66 Ḅ.D2.C1
N$29
  Top 0.305: Ḅ.R3.2 40.92,22.58 39.13,22.58 Ḅ.D1.C1
N$30
  Bottom 0.61: D.U2.VOUT 67.65,65.85 67.86,66.05 | D.L1.1 67.86,67.91
  Bottom 1.016: 67.86,67.91 67.86,66.05
N$31  (via drill 0.3)
  Top 0.305: D.R1.1 64.19,55.64 v64.19,56.5
  Bottom 0.305: U$3.B5 63.69,56.98 64.17,56.5 v64.19,56.5
N$32  (via drill 0.3)
  Top 0.305: D.R2.1 66.89,55.38 v66.89,56.5
  Bottom 0.305: U$3.A5 66.69,56.7 v66.89,56.5
N$33  (via drill 0.3)
  Top 0.305: v55.34,66.84 55.16,66.66 55.16,64.81 D.R7.2
  Bottom 0.305: D.U1.2 56.07,68.43 56.07,67.71 55.34,66.98 v55.34,66.84
N$34
  Bottom 0.305: D.U1.7 56.25,63.3 56.25,55.97 D.D1.1
N$35  (via drill 0.3)
  Top 0.305: D.R9.2 56.45,54.01 54.06,56.39 54.06,66.76 v53.74,67.08
  Bottom 0.305: 60.11,65.33 D.R8.1 60.16,65.33 59.63,64.8 54.4,64.8 54.07,65.13 54.07,66.93 53.92,67.08 v53.74,67.08 54.17,67.08 54.9,67.82 54.9,68.53 D.U1.1
N$36
  Top 0.305: 66.47,68.76 D.D3.K | D.ON/OFF/RESET.P$1 D.ON/OFF/RESET.P$5 66.01,70.7 66.01,68.44 D.D3.K | D.ON/OFF/RESET.P$1 66.86,70.85 | D.ON/OFF/RESET.P$1 D.ON/OFF/RESET.P$7 | D.R11.1 67.61,68.14 66.38,68.14 | 66.38,68.14 | 66.38,68.14 D.D3.K
  Bottom 0.305: D.U2.SHDN 65.75,64.16 66.75,65.16 66.75,70.64 D.ON/OFF/RESET.P$1
N$37
  Top 0.305: D.D3.A 66.31,65.8 67.77,65.8 D.R12.2
N$38
  Bottom 0.305: G.J3.4 77.1,41.61 P.R2.2 84.07,46.75 P.U2.3
N$39
  Top 0.305: Ḅ.R7.1 44.44,12.73
  Top 0.61: 44.44,12.73 B.J8.3 | Ḅ.T2.D 41.6,12.72 44.37,12.72 Ḅ.R7.1 44.47,12.78 Ḅ.C1.1
N$40  (via drill 0.35)
  Top 0.305: Ḇ.U1.4 55.29,17.21 55.75,17.21 57.11,18.57 v57.11,19.61 | Ḇ.D1.A1 60.82,23.18 57.24,23.18 v57.06,23.01
  Bottom 0.305: v57.06,23.01 57.09,22.98 57.09,19.64 v57.11,19.61
N$41
  Top 0.305: Ḇ.R4.2 64.98,21.66 63.1,21.66 Ḇ.D2.C1
N$42
  Top 0.305: Ḇ.R3.2 64.92,22.58 63.13,22.58 Ḇ.D1.C1
N$43
  Top 0.305: Ḇ.R7.1 68.44,12.73
  Top 0.61: 68.44,12.73 B.J12.3 | Ḇ.T2.D 65.6,12.72 68.37,12.72 Ḇ.R7.1 68.47,12.78 Ḇ.C1.1
N$44
  Top 0.305: 92.9,12.73 B.C11.1 | 92.18,12.64 92.26,12.73
  Top 0.35: 92.18,12.64 89.11,12.64
  Top 0.406: 89.11,12.64 89.03,12.72 | 88.78,12.72 B.T1.D
  Top 0.508: B.R17.1 B.C11.1
  Top 0.61: B.J16.3 93.13,12.73 92.9,12.73
  Top 0.813: 93.13,12.73 92.26,12.73 | 89.03,12.72 88.78,12.72
N$45
  Top 0.305: B.R14.1 B.D12.A1
N$46  (via drill 0.3)
  Top 0.305: v91.96,5.91 91.32,5.28 90.26,5.28 90.14,5.16 B.R13.2 | B.U11.4 79.7,19.04 81.01,19.04 81.32,19.35 v81.32,22.04 v81.33,22.05
  Bottom 0.305: v91.96,5.91 92.16,6.12 92.16,20.72 90.48,22.4 82.65,22.4 82.42,22.18 81.45,22.18 v81.33,22.05
N$47  (via drill 0.35)
  Top 0.305: G.J9.1 22.95,41.66 19.54,41.66 17.52,39.64 16.03,39.64 13.58,37.2 v13.58,31.51
  Bottom 0.305: v13.58,31.51 15.07,31.51 O.R3.2
N$48  (via drill 0.35)
  Top 0.305: U$4.RXD 21.05,34.65 17.07,34.65 v17.06,34.64
  Bottom 0.305: O.R1.1 14.67,34.64 v17.06,34.64
N$49  (via drill 0.35)
  Top 0.305: v18.9,33.19 v18.9,33.2 U$4.TXD
  Bottom 0.305: v18.9,33.19 13.4,33.19 8.6,37.99 O.R6.1
N$50
  Bottom 0.305: G.J8.5 6.22,43.03 6.22,42.03 6.54,41.71 9.25,41.71 10.25,40.71 O.R7.2
N$51  (via drill 0.35)
  Top 0.305: U$4.PWRC 16.39,37.7 v16.3,37.61
  Bottom 0.305: 16.29,37.6 v16.3,37.61 14.5,37.61 12.05,40.06 12.05,40.68 O.R7.1
N$52  (via drill 0.35)
  Top 0.305: O.D2.A1 23.11,29.91 v22.37,29.18
  Bottom 0.305: O.R5.1 21.1,29.16 22.36,29.16 v22.37,29.18
N$53  (via drill 0.35)
  Top 0.305: U$4.ALED 20.6,30.2 19.56,31.23 v19.38,31.23
  Bottom 0.305: 19.52,31.27 v19.38,31.23 20.7,31.23 20.87,31.1 O.R5.2
N$54
  Top 0.305: O.D1.A1 5.04,32.25 5.98,33.2 U$4.STAT
N$55  (via drill 0.35)
  Top 0.305: JP5.5 54.64,46.09 v60.8,46.09 K.R3.1
  Bottom 0.305: K.R6.2 60.85,46.04 v60.8,46.09
N$56
  Bottom 0.305: JP5.4 52.9,41.59 57.35,37.13 63.02,37.13 63.75,37.86 K.R4.1 65.23,38.14 K.R2.2
N$57
  Bottom 0.305: K.R5.2 57.8,46.68 J1.3